# Altium PCB SB0041B.PCBDOC
Units mil, origin at the board's own origin, x right, y up, seen from the top; angles counter-clockwise.
Board outline 1825 x 1080 mil, 2 copper layers (Top Layer, Bottom Layer), stack 31.2 mil thick; 51 components, 36 nets, 174 pads, 65 vias.
Unrouted connection lines stored in the file: 1.
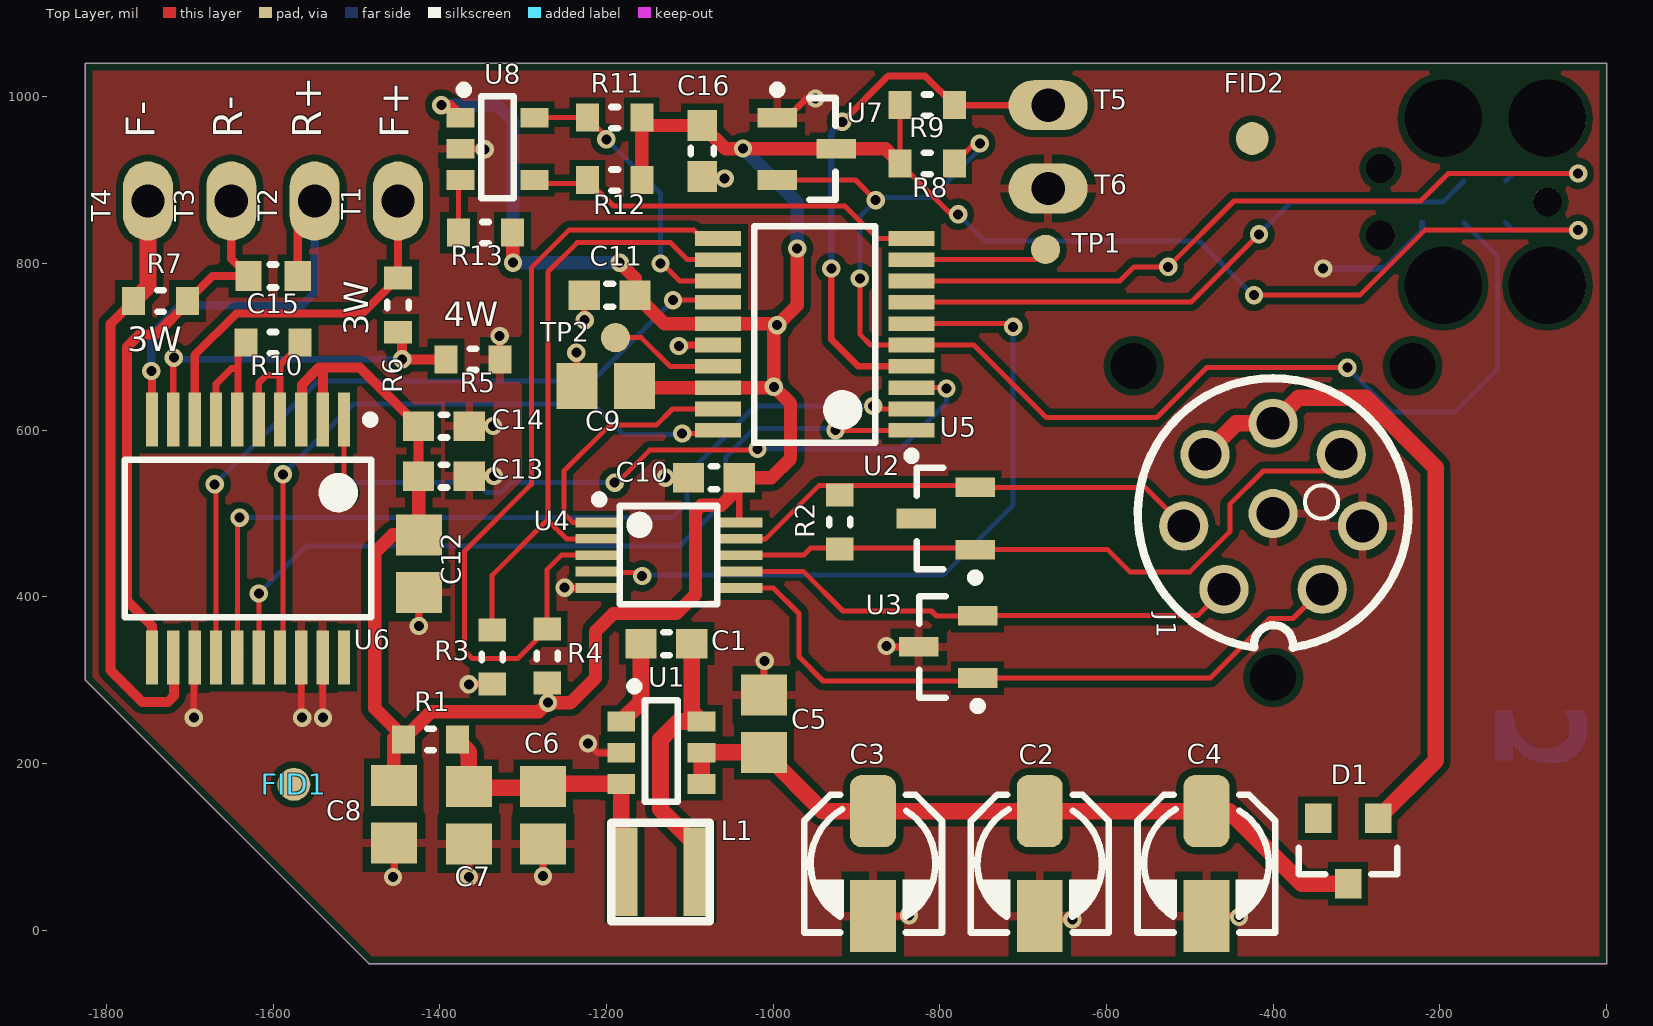
[diagram p0: Top Layer view]
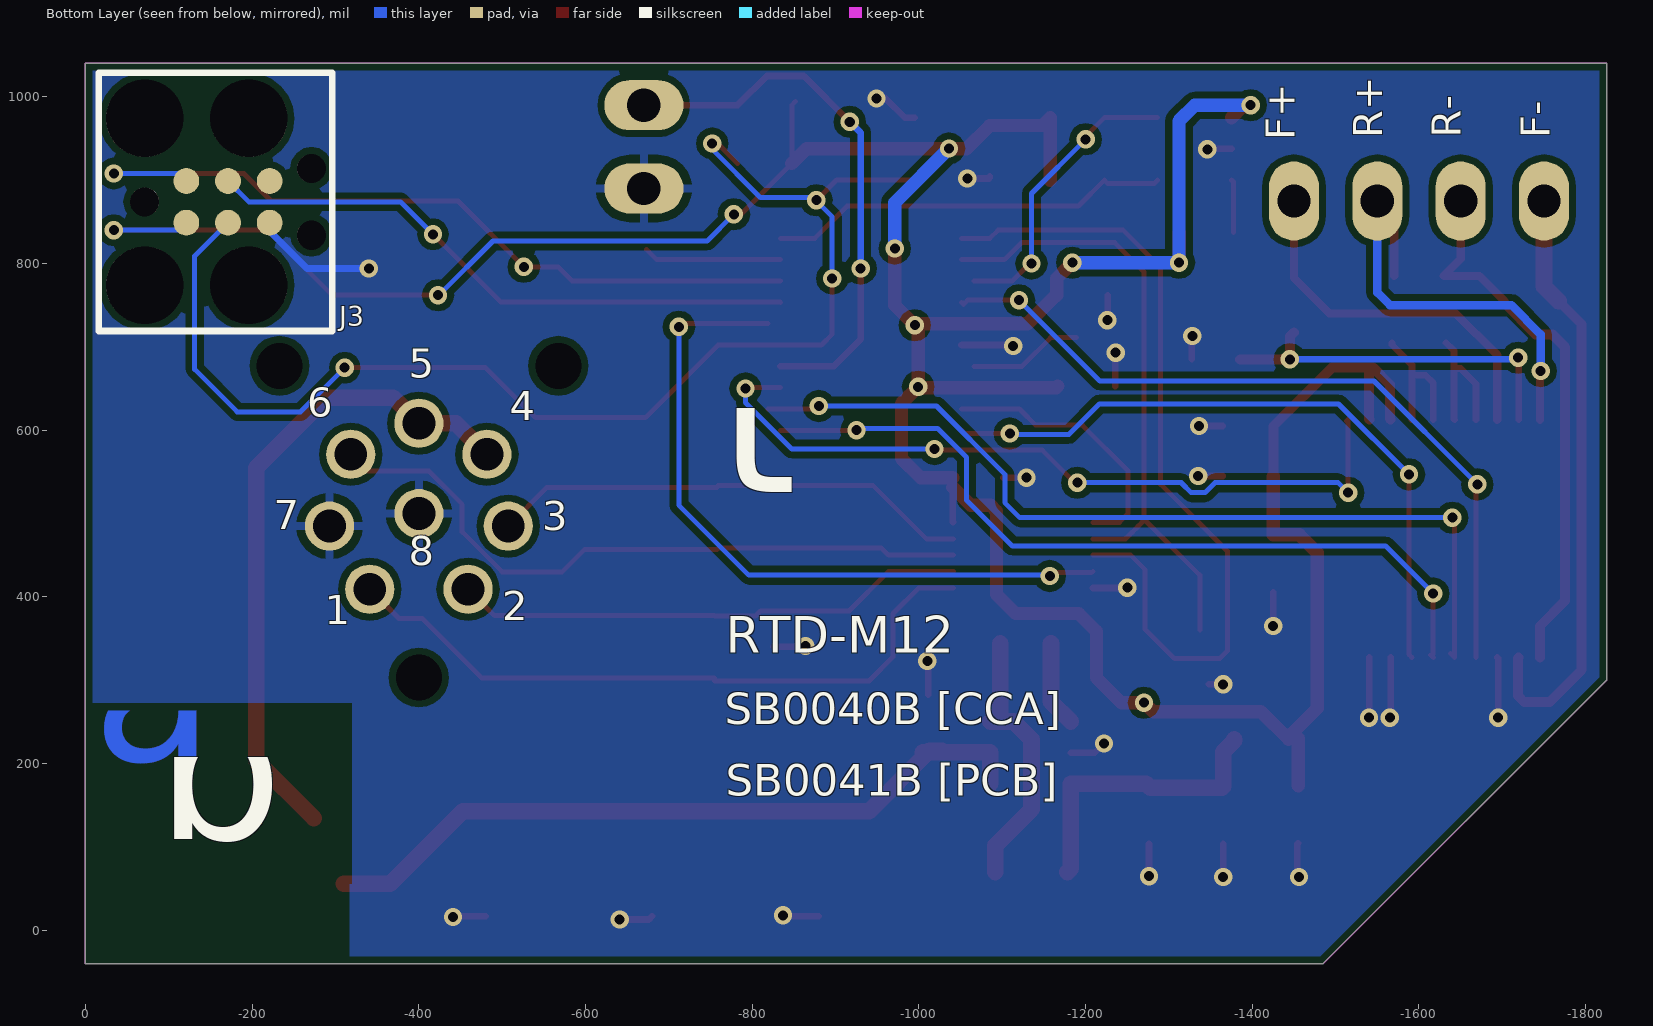
[diagram p1: Bottom Layer view, seen from below]
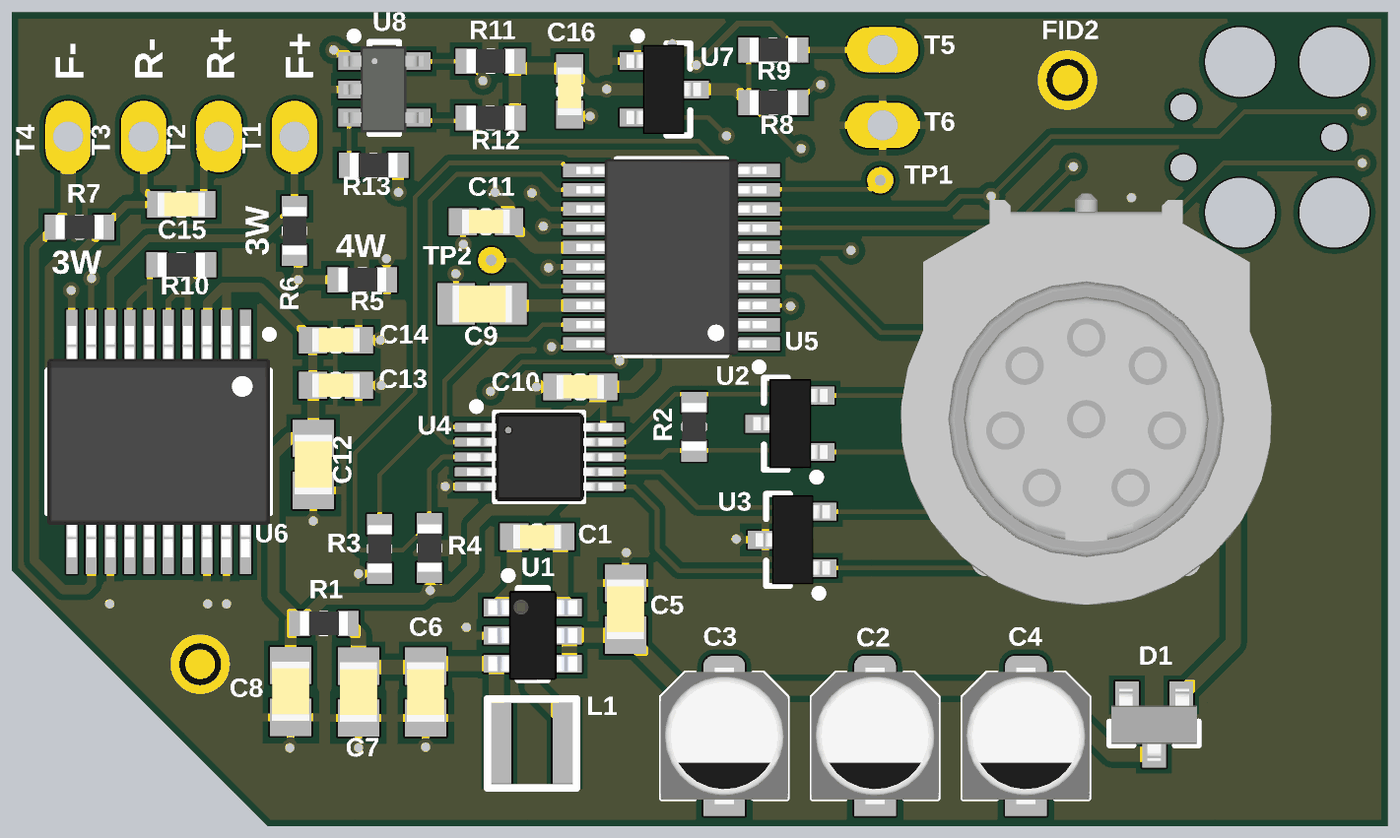
[diagram p2: 3D render of the assembled board from above, using the file's embedded part models]

## Layer stack, top to bottom
Top Solder: solder mask 0.4, Solder Resist, Dk 3.5
Top Layer: signal copper 1.4
Dielectric 3: core 28.4, Core-042, Dk 4.6
Bottom Layer: signal copper 1.4
Bottom Solder: solder mask 0.4, Solder Resist, Dk 3.5

## Board outline
-1825,300 -1485,-40 0,-40 0,1040 -1825,1040

## Design rules (kind name [scope] priority, off if disabled: settings)
Clearance [All] p1: gap=6 ignorepadtopadclearanceinfootprint=TRUE except(8: Arc-Poly Arc-Hole Track-Poly Track-Hole SMDPad-Poly SMDPad-Hole THPad-Poly THPad-Hole Via-Poly Via-Hole Fill-Poly Fill-Hole Poly-Poly Poly-Hole Region-Hole Text-Hole)
ComponentClearance [All] p1: gap=0 collisioncheckmode=3 verticalgap=0 showdistances=FALSE
DiffPairsRouting [All] p1: maxlimit=6 minlimit=6 mostfreqgap=6 toplayer_minwidth=6 toplayer_maxwidth=8 toplayer_prefwidth=8 bottomlayer_minwidth=6 bottomlayer_maxwidth=8 bottomlayer_prefwidth=8 maxuncoupledlength=500
FabricationTestPointUsage TestPointUsage [All] p1: valid=0 allowmultiple=FALSE
FabricationTestpoint Testpoint [All] p1: side=3 testpointundercomponent=TRUE minsize=40 maxsize=100 preferedsize=60 minholesize=0 maxholesize=40 preferedholesize=32 testpointgrid=1 allowsidetop=TRUE allowsidebottom=TRUE usegrid=TRUE gridtolerance=0.01
HoleSize [All] p1: absolutevalues=TRUE maxlimit=500 minlimit=8 maxpercent=80.000 minpercent=20.000
HoleToHoleClearance [All] p1: gap=0 allowstackedmicrovias=TRUE
MinimumSolderMaskSliver [All] p1: minsoldermaskwidth=0
PlaneClearance [All] p1: clearance=12
PlaneConnect [All] p1: planeconnectstyle=Relief reliefexpansion=12 reliefentries=4 reliefconductorwidth=6 reliefairgap=6
PolygonConnect PolygonConnect_vis [IsVia] p1: connectstyle=Direct reliefconductorwidth=10 reliefentries=4 polygonreliefangle="90 Angle" airgapwidth=10
PolygonConnect [All] p2: connectstyle=Relief reliefconductorwidth=10 reliefentries=4 polygonreliefangle="90 Angle" airgapwidth=10
RoutingVias [All] p1: holewidth=8 width=18 viastyle="Through Hole" minholewidth=12 minwidth=22 maxholewidth=20 maxwidth=50
ShortCircuit ShortCircuit_1 [HasFootprint('4-40 X 250') vs HasFootprint('4-40 X 250')] p1: allowed=TRUE
ShortCircuit [All] p2: allowed=FALSE
SilkToSilkClearance [All] p1: silktosilkclearance=0
SilkToSolderMaskClearance SilkscreenOverComponentPads [IsPad] p1: minsilkscreentomaskgap=1 clearancetoexposedcopper=TRUE
SolderMaskExpansion [All] p1: expansion=2.5 istentingtop=FALSE
Width 50z [InNetClass('50OHM')] p1: maxlimit=12 minlimit=10 preferedwidth=12
Width [All] p2: maxlimit=200 minlimit=6 preferedwidth=6
18 further rules are at their usual default settings.

## Components (designator, comment, footprint, x,y, rotation, side; value= is the part's Value field where it differs from the comment)
C1 "0.1µF" C0603_0.90MM_MD -1128,344 r180 top
C2 "10µF" C_ALU_B -680,80 r270 top
C3 "10µF" C_ALU_B -880,80 r270 top
C4 "10µF" C_ALU_B -480,80 r270 top
C5 "4.7µF" C0805_1.50MM_MD -1011,248 r270 top
C6 "10µF" C0805_1.25MM_MD -1276,138 r90 top
C7 "10µF" C0805_1.25MM_MD -1365,138 r90 top
C8 "10µF" C0805_1.25MM_MD -1455,139 r90 top
C9 "10µF" C0805_1.25MM_MD -1201,653 r0 top
C10 "0.1µF" C0603_0.90MM_MD -1071,543 r0 top
C11 "0.1µF" C0603_0.90MM_MD -1196,762 r0 top
C12 "10µF" C0805_1.25MM_MD -1425,440 r90 top
C13 "0.1µF" C0603_0.90MM_MD -1395,545 r180 top
C14 "0.1µF" C0603_0.90MM_MD -1395,605 r180 top
C15 "10000pF" C0603_0.90MM_HD -1600,785 r0 top
C16 "0.1µF" C0603_0.90MM_MD -1085,935 r90 top
D1 "BAT1000-7-F" D_SOT-23-3_P -310,95 r270 top
FID1 "PCB Fiducial" "Fiducial 1mm - 2mm" -1575,175 r0 top
FID2 "PCB Fiducial" "Fiducial 1mm - 2mm" -425,950 r0 top
J1 "1557808" 1557808 -400,500 r180 top locked
J3 "TC2030‐CTL‐NL" TC2030 -11,714 r180 bottom
L1 "15µH 0.53A" L_NRH3012 -1135,70 r180 top
R1 "0" R0603_0.55MM_MD -1411,229 r180 top
R2 "100" R0603_0.55MM_MD -920,490 r270 top
R3 "1k" R0603_0.55MM_MD -1337,328 r90 top
R4 "1k" R0603_0.55MM_MD -1271,329 r270 top
R5 "0" R0603_0.55MM_MD -1360,685 r0 top
R6 "0" R0603_0.55MM_MD -1450,750 r90 top
R7 "0" R0603_0.55MM_MD -1735,755 r180 top
R8 "100k" R0603_0.55MM_MD -815,920 r0 top
R9 "1k" R0603_0.55MM_MD -815,990 r0 top
R10 "401 .01% +/0 10ppm/C" R0603_0.55MM_MD -1600,705 r0 top
R11 "1k" R0603_0.55MM_MD -1190,975 r180 top
R12 "1k" R0603_0.55MM_MD -1190,900 r180 top
R13 "1k" R0603_0.55MM_MD -1345,837 r180 top
T1 "Wire Hole" SOLDER_HOLE -1450,875 r180 top
T2 "Wire Hole" SOLDER_HOLE -1550,875 r180 top
T3 "Wire Hole" SOLDER_HOLE -1650,875 r180 top
T4 "Wire Hole" SOLDER_HOLE -1750,875 r180 top
T5 "Wire Hole" SOLDER_HOLE -670,990 r90 top
T6 "Wire Hole" SOLDER_HOLE -670,890 r90 top
TP1 "SMT_TEST" "SMT_TP - 35" -673,817 r0 top
TP2 "SMT_TEST" "SMT_TP - 35" -1189,711 r0 top
U1 "TPS560430X3FDBVR" SOT95P245X145-6L -1134,213 r0 top
U2 "SM712-02HTG" SOT-23 -793,494 r180 top
U3 "SM712-02HTG" SOT-23 -790,340 r180 top
U4 "ISL3176EIUZ-T" "10 MSOP" -1125,450 r0 top
U5 "LPC804M101JDH20FP" TSOP65P640X105-20N -950,715 r180 top
U6 "MAX31865AAP+" SOP65P780X200-20N -1630,470 r270 top
U7 "MIC803-30D2VM3-TR" SOT-23 -959.57,937.6 r0 top
U8 "MCP9800A0T-M/OT" SOT23-5 -1330.71,937.6 r0 top

## Footprints (in the part's own frame and the unit in brackets; to place one, negate y for a bottom-side part, rotate by r counter-clockwise, add the part's x,y. Pads: shape width x height; smd on the part's side, far side on the other; paste and mask are expansions set on the pad)
"10 MSOP" [mm] "(Reference LTC DWG # 05-08-1661 Rev E)"
  rect 1.45x0.3 smd: 1(-2.125,1) 2(-2.125,0.5) 3(-2.125,0) 4(-2.125,-0.5) 5(-2.125,-1) 6(2.125,-1) 7(2.125,-0.5) 8(2.125,0) 9(2.125,0.5) 10(2.125,1)
  silkscreen extent -2.25,-1.5 1.48,1.82, body extent -2.45,-1.5 2.45,1.5, height 1.15
1557808 [mm]
  round 1.5 hole 1: 1(-1.498,2.306) 2(1.498,2.306) 3(2.723,0.383) 4(2.075,-1.804) 5(0,-2.75) 6(-2.075,-1.804) 7(-2.723,0.383) 8(0,0)
  round 0 hole 1.4: M(-4.25,-4.5) M(0,5) M(4.25,-4.5)
  silkscreen extent -4.12,-4.12 4.12,4.1, body extent -6.25,-7.6 6.25,6.25, height 19.51
C0603_0.90MM_HD [mm] "Capacitor 0603 - High Density"
  rect 0.8x0.9 smd: 1(-0.75,0) 2(0.75,0)
  silkscreen extent -0.1,-0.35 0.1,0.35, body extent -0.8,-0.4 0.8,0.4, height 0.9
C0603_0.90MM_MD [mm] "Capacitor 0603 - Medium Density"
  rect 0.95x0.9 smd: 1(-0.775,0) 2(0.775,0)
  silkscreen extent -0.1,-0.35 0.1,0.35, body extent -0.8,-0.4 0.8,0.4, height 0.9
C0805_1.25MM_MD [mm] "Capacitor - 0805 - Medium Density"
  rect 1.25x1.4 smd: 1(-0.875,0) 2(0.875,0)
  body extent -1,-0.62 1,0.63, height 1.25
C0805_1.50MM_MD [mm] "Capacitor - 0805 - Medium Density"
  rect 1.25x1.4 smd: 1(-0.875,0) 2(0.875,0)
  body extent -1,-0.62 1,0.63, height 1.5
C_ALU_B [mm] "4.0mm x 5.8mm"
  rrect50% 2.2x1.4 smd: 1(-1.6,0)
  rect 2.2x1.4 smd: 2(1.6,0)
  silkscreen extent -2.1,-2.1 2.1,2.1, body extent -2.3,-2.15 2.3,2.15, height 5.42
D_SOT-23-3_P [mm] "Diode - SOT-23-3 - Polarized"
  rect 0.9x0.8 smd: 1(-1,0.915) 2(-1,-0.915) 3(1,0)
  silkscreen extent -0.1,-1.5 0.7,1.5, body extent -1.2,-1.45 1.22,1.45, height 0.98
"Fiducial 1mm - 2mm" [mm] "1mm Pad 2mm Opening"
  round 1 smd paste-10 mask+0.5: 1(0,0)
L_NRH3012 [mm] "Inductor"
  rect 0.8x2.7 smd: 1(-1.1,0) 2(1.1,0)
  silkscreen extent -1.5,-1.5 1.5,1.5, body extent -1.5,-1.5 1.5,1.5, height 1.2
R0603_0.55MM_MD [mm] "Resistor 0603 Medium Density"
  rect 0.7x0.85 smd: 1(-0.825,0) 2(0.825,0)
  silkscreen extent -0.1,-0.33 0.1,0.33, body extent -0.8,-0.4 0.8,0.4, height 0.55
"SMT_TP - 35" [mil] ".035\" SMT Test pad"
  round 35 smd paste-10: 1(0,0)
SOLDER_HOLE [mil]
  oval 60x95 hole 40: 1(0,0)
SOP65P780X200-20N [mm] "SOP, 20-Leads, Body 7.20x5.30mm, Pitch 0.65mm, IPC Medium Density"
  rect 1.65x0.375 smd: 1(-3.625,2.925) 2(-3.625,2.275) 3(-3.625,1.625) 4(-3.625,0.975) 5(-3.625,0.325) 6(-3.625,-0.325) 7(-3.625,-0.975) 8(-3.625,-1.625) 9(-3.625,-2.275) 10(-3.625,-2.925) 11(3.625,-2.925) 12(3.625,-2.275) 13(3.625,-1.625) 14(3.625,-0.975) 15(3.625,-0.325) 16(3.625,0.325) 17(3.625,0.975) 18(3.625,1.625) 19(3.625,2.275) 20(3.625,2.925)
  silkscreen extent -3.75,-3.75 2.4,3.85, body extent -3.9,-3.75 3.9,3.75, height 2
SOT23-5 [mm] "SOT23, 5-Leads, Body 3.1x2.6mm (max), Pitch 0.95mm, IPC High Density"
  rect 0.85x0.6 smd: 1(-1.125,0.95) 2(-1.125,0) 3(-1.125,-0.95) 4(1.125,-0.95) 5(1.125,0.95)
  silkscreen extent -1.15,-1.5 0.5,1.92, body extent -1.38,-1.45 1.32,1.45, height 1.15
SOT95P245X145-6L [mm] "SOT23, 6-Leads, Body 3.1x2.6mm (max), Pitch 0.95mm, IPC High Density"
  rect 0.85x0.6 smd: 1(-1.225,0.95) 2(-1.225,0) 3(-1.225,-0.95) 4(1.225,-0.95) 5(1.225,0) 6(1.225,0.95)
  silkscreen extent -0.95,-1.5 0.5,2.15, body extent -1.5,-1.5 1.5,1.5, height 1.3
SOT-23 [mm] "SOT-23"
  rect 1.2x0.6 smd: 1(-0.9,0.95) 2(-0.9,-0.95) 3(0.9,0)
  silkscreen extent -1.03,-1.55 0.87,1.92, body extent -1.27,-1.5 1.23,1.5, height 1.07
TC2030 [mil] "TC2030-MCP"
  round 31 smd paste-40: 1(110,135) 2(110,185) 3(160,135) 4(160,185) 5(210,135) 6(210,185)
  round 34 hole 35 unplated: A(60,160) B(260,200) C(260,120)
  round 92 hole 93 unplated: D(60,60) E(185,60) F(60,260) G(185,260)
  silkscreen extent 5,5 285,315
TSOP65P640X105-20N [mm] "TSOP, 20-Leads, Body 6.50x4.40mm, Pitch 0.65mm, IPC Medium Density"
  rect 1.4x0.45 smd: 1(-2.95,2.925) 2(-2.95,2.275) 3(-2.95,1.625) 4(-2.95,0.975) 5(-2.95,0.325) 6(-2.95,-0.325) 7(-2.95,-0.975) 8(-2.95,-1.625) 9(-2.95,-2.275) 10(-2.95,-2.925) 11(2.95,-2.925) 12(2.95,-2.275) 13(2.95,-1.625) 14(2.95,-0.975) 15(2.95,-0.325) 16(2.95,0.325) 17(2.95,0.975) 18(2.95,1.625) 19(2.95,2.275) 20(2.95,2.925)
  silkscreen extent -3.08,-3.3 1.85,3.82, body extent -3.2,-3.3 3.2,3.3, height 1.05

## Part data
C1 C10 C11 C13 C14 C16: library part CGA3E2X7R1H104K080AE, "CAP CER 0.1UF 50V X7R 0603", Manufacturer="TDK Corporation", Operating Temperature="-55°C ~ 125°C", Package=0603, Ratings=AEC-Q200, Supplier Part Number 1=445-15957-1-ND, Temperature Coefficient=X7R, Tolerance=±10%, Voltage - Rated=50V, Category=Capacitors, ComponentLink1Description="Datasheet (Internal)", ComponentLink1URL=datasheets\TDK\mlcc_automotive_general_en.pdf, ComponentLink2Description="Datasheet (External)", ComponentLink2URL=https://product.tdk.com/info/en/catalog/datasheets/mlcc_automotive_general_en.pdf, Features="Soft Termination", Manufacturer Part Number=CGA3E2X7R1H104K080AE, Substitution Notes="0.1µF , 50V , ±10% , X7R , -55°C ~ 125°C , AEC-Q200 , 0603", Supplier 1=Digikey, Thickness (Max)=0.90MM
C2 C3 C4: library part EEE-FK1V100UR, "CAP ALUM 10UF 35V 20% SMD", ESR (Equivalent Series Resistance)=-, Lifetime @ Temp#="2000 Hrs @ 105°C", Manufacturer="Panasonic Electronic Components", Operating Temperature="-55°C ~ 105°C", Package=B, Package / Case="Radial- Can - SMD", Ratings=AEC-Q200, Ripple Current=90mA, Sort Value=10000000, Sort Value Package=B_10000000, Supplier Part Number 1=PCE3834CT-ND, Temperature Coefficient="Temperature Coefficient", Tolerance=±20%, Value_Voltage="10µF  35V", Voltage Rating=35V, Capacitance=10µF, Category=Capacitors, ComponentLink1Description="Internal Datasheet", ComponentLink1URL=http://industrial.panasonic.com/www-cgi/jvcr13pz.cgi?E+PZ+3+ABA0120+EEEFK1V100UR+7+WW, ComponentLink2Description="External Datasheet", ComponentLink2URL=http://industrial.panasonic.com/www-cgi/jvcr13pz.cgi?E+PZ+3+ABA0120+EEEFK1V100UR+7+WW, Diameter=4.00, Features="General Purpose", Height=5.80, Height - Seated (Max)="0.228\" (5.80mm)", Impedance="1.35 Ohm", Lead Spacing=-, Manufacturer Part Number=EEE-FK1V100UR, Mounting Type="Surface Mount", Packaging="Cut Tape (CT)", Size / Dimension="0.157\" Dia (4.00mm)", Supplier 1=Digi-Key, Surface Mount Land Size="0.169\" L x 0.169\" W (4.30mm x 4.30mm)"
C5: library part CGA4J1X7R1V475K125AE, "CAP CER 4.7UF 35V X7R 0805", Manufacturer="TDK Corporation", Operating Temperature="-55°C ~ 125°C", Package=0805, Ratings=AEC-Q200, Supplier Part Number 1=445-172479-1-ND, Temperature Coefficient=X7R, Tolerance=±10%, Voltage - Rated=35V, Category=Capacitors, ComponentLink1Description="Datasheet (Internal)", ComponentLink1URL=datasheets\TDK\mlcc_automotive_general_en.pdf, ComponentLink2Description="Datasheet (External)", ComponentLink2URL=https://product.tdk.com/info/en/catalog/datasheets/mlcc_automotive_general_en.pdf, Features="Soft Termination", Manufacturer Part Number=CGA4J1X7R1V475K125AE, Substitution Notes="4.7µF , 35V , ±10% , X7R , -55°C ~ 125°C , AEC-Q200 , 0805", Supplier 1=Digikey, Thickness (Max)=1.50MM
C6 C7 C8 C9 C12: library part CGA4J1X7R0J106K125AD, "CAP CER 10UF 6.3V X7R 0805", Manufacturer="TDK Corporation", Operating Temperature="-55°C ~ 125°C", Package=0805, Ratings=AEC-Q200, Supplier Part Number 1=445-9935-1-ND, Temperature Coefficient=X7R, Tolerance=±10%, Voltage - Rated=6.3V, Category=Capacitors, ComponentLink1Description="Datasheet (Internal)", ComponentLink1URL=datasheets\TDK\mlcc_automotive_general_en.pdf, ComponentLink2Description="Datasheet (External)", ComponentLink2URL=https://product.tdk.com/info/en/catalog/datasheets/mlcc_automotive_general_en.pdf, Features="Epoxy Mountable", Manufacturer Part Number=CGA4J1X7R0J106K125AD, Substitution Notes="10µF , 6.3V , ±10% , X7R , -55°C ~ 125°C , AEC-Q200 , 0805", Supplier 1=Digikey, Thickness (Max)=1.25MM
C15: library part AC0603KPX7R9BB103, "CAP CER 10000PF 50V X7R 0603", Manufacturer=Yageo, Operating Temperature="-55°C ~ 125°C", Package=0603, Ratings=AEC-Q200, Supplier Part Number 1=311-3284-1-ND, Temperature Coefficient=X7R, Tolerance=±10%, Voltage - Rated=50V, Category=Capacitors, ComponentLink1Description="Datasheet (Internal)", ComponentLink1URL=datasheets\Yageo\yageo_ac.pdf, ComponentLink2Description="Datasheet (External)", ComponentLink2URL=http://www.yageo.com/NewPortal/yageodocoutput?fileName=/pdf/MLCC/UPY-AC_NP0X7R_16V-to-630V_9.pdf, Manufacturer Part Number=AC0603KPX7R9BB103, Substitution Notes="10000pF , 50V , ±10% , X7R , -55°C ~ 125°C , AEC-Q200 , 0603", Supplier 1=Digikey, Thickness (Max)=0.90MM
D1: "DIODE SCHOTTKY 40V 1A SOT23", Capacitance @ Vr- F="175pF @ 0V- 1MHz", Current - Average Rectified (Io)=1A, Current - Reverse Leakage @ Vr="100µA @ 30V", Manufacturer="Diodes Inc", Package="TO-236-3- SC-59- SOT-23-3", Supplier Device Package=SOT-23-3, Supplier Part Number 1=BAT1000-7FDICT-ND, Voltage - DC Reverse (Vr) (Max)=40V, Voltage - Forward (Vf) (Max) @ If="500mV @ 1A", Category=Diodes, CategorySort=400, ComponentLink1Description="Internal Datasheet", ComponentLink1URL=http://www.diodes.com/datasheets/ds30245.pdf, ComponentLink2Description="External Datasheet", ComponentLink2URL=http://www.diodes.com/datasheets/ds30245.pdf, Diode Suffix=1A_3C, Diode Type=Schottky, Manufacturer Part Number=BAT1000-7-F, Mounting Type="Surface Mount", Num Pins=3, Packaging="Cut Tape (CT)", Reverse Recovery Time (trr)=-, SortValue=BAT1000-7-F, Speed="Fast Recovery =< 500ns- > 200mA (Io)", Supplier 1=Digi-Key
J1: "Circular Metric Connectors SACC-CI-M12FS -8CON-L180-THR", Current Rating=2A, Manufacturer="Phoenix Contact", Max Operating Temperature=85°C, Min Operating Temperature=-25°C, Package Quantity=60, Ratings="IP67,Waterproof,Dust Tight", Supplier Part Number 1=1557808-ND, Voltage Rating=30V, Category="Circular Connectors", ComponentLink1Description=https://datasheet.ciiva.com/618/1557808-618998.pdf?src-supplier=Digi-Key, ComponentLink1URL=https://datasheet.ciiva.com/618/1557808-618998.pdf?src-supplier=Digi-Key, ComponentLink2Description=https://datasheet.ciiva.com/3962/1557808-3962478.pdf?src-supplier=Arrow, ComponentLink2URL=https://datasheet.ciiva.com/3962/1557808-3962478.pdf?src-supplier=Arrow, ComponentLink3Description=https://datasheet.ciiva.com/29259/719945-da-01-en-sens-akt-einbaubuch-8pol-1557808-60-st-29259366.pdf?src-supplier=Conrad, ComponentLink3URL=https://datasheet.ciiva.com/29259/719945-da-01-en-sens-akt-einbaubuch-8pol-1557808-60-st-29259366.pdf?src-supplier=Conrad, Connector Type=Receptacle, Contact Gender=Female, Contact Material=Brass, Contact Plating=Gold, Fastening Type=Threaded, Gender=Female, Manufacturer Part Number=1557808, Max Current Rating=2A, Mount="Through Hole", Number of Contacts=8, Number of Ports=1, Number of Positions=8, Number of Terminals=8, Orientation=Straight, Packaging=Tray, RoHS=Yes, Strain Relief="No (Without)", Supplier 1=Digi-Key, Termination=Solder, Thread Size=M12, Weight=0.134041oz
J3: "Tag Connect Pads - No latching Clips - ARM"
L1: library part NRH3012T150MN, "Inductor 15µH 0.53A", Inductance (uH)=15, Manufacturer="Taiyo Yuden", Package=NRH3012, Rating=-, Sort Value=15_0.53, Sort Value Package=15_0.53_NRH3012, Supplier Part Number 1=587-2585-1-ND, Tolerance=±20%, Category=Inductors, CategorySort=300, ComponentLink1Description="External Datasheet", ComponentLink1URL=https://www.yuden.co.jp/productdata/catalog/en/wound04_e.pdf, DCR Max (Ohms)="540 mOhm Max", Height (mm)=1.2MM, IRMS=0.57, Isat (A)=0.53, Manufacturer Part Number=NRH3012T150MN, Part Number=NRH3012T150MN, Shielding=Sheilded, SRF typ (MHz)=26MHz, Supplier 1=Digikey, Supplier Unit Price 1=0.28
R1 R5 R6 R7: library part ERJ-3GEY0R00V, "RES 0.0 OHM 1/10W JUMP 0603 SMD", Limiting Element Voltage=75, Manufacturer="Panasonic Electronic Components", Maximum Overload Voltage=150, Maximum Working Voltage=0.0V, Package="0603 (1608 Metric)", Package Power="0603  (0.1W)", Power (Watts)="0.1W- 1/10W", Ratings=AEC-Q200, Sort Value Package=603_0, Supplier Package=0603, Supplier Part Number 1=P0.0GCT-ND, Temperature Coefficient=-, Tolerance=Jumper, Category=Resistors, ComponentLink1Description="Internal Datasheet", ComponentLink1URL="datasheets\Panasonic Electronic Components\AOA0000CE1.pdf", ComponentLink2Description="External Datasheet", ComponentLink2URL=http://industrial.panasonic.com/www-data/pdf/AOA0000/AOA0000CE1.pdf, Composition="Thick Film", Features=-, Height=0.55MM, Manufacturer Part Number=ERJ-3GEY0R00V, Number of Terminations=2, Resistance (Ohms)=0, Size / Dimension="0.063\" L x 0.031\" W (1.60mm x 0.80mm)", Sort Value=0, Substitution Notes="0 , Jumper , 0603 , AEC-Q200", Supplier 1=Digi-Key
R2: library part ERJ-3EKF1000V, "RES 100 OHM 1/10W 1% 0603 SMD", Limiting Element Voltage=75, Manufacturer="Panasonic Electronic Components", Maximum Overload Voltage=150, Maximum Working Voltage=3.2V, Package="0603 (1608 Metric)", Package Power="0603  (0.1W)", Power (Watts)="0.1W- 1/10W", Ratings=AEC-Q200, Sort Value Package=603_100, Supplier Package=0603, Supplier Part Number 1=P100HCT-ND, Temperature Coefficient=±100ppm/°C, Tolerance=±1%, Category=Resistors, ComponentLink1Description="Internal Datasheet", ComponentLink1URL="datasheets\Panasonic Electronic Components\AOA0000CE2.pdf", ComponentLink2Description="External Datasheet", ComponentLink2URL=http://industrial.panasonic.com/www-data/pdf/AOA0000/AOA0000CE2.pdf, Composition="Thick Film", Features=-, Height=0.55MM, Manufacturer Part Number=ERJ-3EKF1000V, Number of Terminations=2, Packaging="Cut Tape (CT)", Resistance (Ohms)=100, Size / Dimension="0.063\" L x 0.031\" W (1.60mm x 0.80mm)", Sort Value=100, Substitution Notes="100 , ±1% , 0603 , AEC-Q200", Supplier 1=Digi-Key
R3 R4 R9 R11 R12 R13: library part ERJ-3EKF1001V, "RES 1K OHM 1/10W 1% 0603 SMD", Limiting Element Voltage=75, Manufacturer="Panasonic Electronic Components", Maximum Overload Voltage=150, Maximum Working Voltage=10.0V, Package="0603 (1608 Metric)", Package Power="0603  (0.1W)", Power (Watts)="0.1W- 1/10W", Ratings=AEC-Q200, Sort Value=1000, Sort Value Package=603_1000, Supplier Package=0603, Supplier Part Number 1=P1.00KHCT-ND, Temperature Coefficient=±100ppm/°C, Tolerance=±1%, Category=Resistors, ComponentLink1Description="Internal Datasheet", ComponentLink1URL="datasheets\Panasonic Electronic Components\AOA0000CE2.pdf", ComponentLink2Description="External Datasheet", ComponentLink2URL=http://industrial.panasonic.com/www-data/pdf/AOA0000/AOA0000CE2.pdf, Composition="Thick Film", Features=-, Height=0.55MM, Manufacturer Part Number=ERJ-3EKF1001V, Number of Terminations=2, Packaging="Cut Tape (CT)", Resistance (Ohms)=1k, Size / Dimension="0.063\" L x 0.031\" W (1.60mm x 0.80mm)", Substitution Notes="1k , ±1% , 0603 , AEC-Q200", Supplier 1=Digi-Key
R8: library part ERJ-3EKF1003V, "RES 100K OHM 1/10W 1% 0603 SMD", Limiting Element Voltage=75, Manufacturer="Panasonic Electronic Components", Maximum Overload Voltage=150, Maximum Working Voltage=75.0V, Package="0603 (1608 Metric)", Package Power="0603  (0.1W)", Power (Watts)="0.1W- 1/10W", Ratings=AEC-Q200, Sort Value=100000, Sort Value Package=603_100000, Supplier Package=0603, Supplier Part Number 1=P100KHCT-ND, Temperature Coefficient=±100ppm/°C, Tolerance=±1%, Category=Resistors, ComponentLink1Description="Internal Datasheet", ComponentLink1URL="datasheets\Panasonic Electronic Components\AOA0000CE2.pdf", ComponentLink2Description="External Datasheet", ComponentLink2URL=http://industrial.panasonic.com/www-data/pdf/AOA0000/AOA0000CE2.pdf, Composition="Thick Film", Features=-, Height=0.55MM, Manufacturer Part Number=ERJ-3EKF1003V, Number of Terminations=2, Packaging="Cut Tape (CT)", Resistance (Ohms)=100k, Size / Dimension="0.063\" L x 0.031\" W (1.60mm x 0.80mm)", Substitution Notes="100k , ±1% , 0603 , AEC-Q200", Supplier 1=Digi-Key
R10: "402 ±0.1% 0.15W Chip Resistor 0603 (1608 Metric) Anti-Sulfur, Automotive AEC-Q200 Thin Film", Manufacturer="TE Connectivity", Manufacturer Part Number=RQ73C1J402RBTD, Supplier Part Number 1=A140868CT-ND, Category="Chip SMD Resistors", Pricing="1=0.73000, 10=0.60900, 100=0.40910, 1000=0.23936, 2500=0.23675 (USD)", RoHS=No, Stock=7920, Supplier 1=Digi-Key
T1 T2 T3 T4 T5 T6: library part SOLDER_HOLE
U1: "Buck Switching Regulator IC Positive PWM 3.3V 1 Output 600mA SOT-23-6", Manufacturer="Texas Instruments", Supplier Part Number 1=296-51994-1-ND, Manufacturer Part Number=TPS560430X3FDBVR, Pricing 1="1 = 2.01000, 10 = 1.80100, 100 = 1.44800, 500 = 1.18966, 1000 = 0.98571 (USD)", Stock 1=3365, Supplier 1=Digi-Key
U2 U3: "LITTELFUSE - SM712-02HTG - ESD Protection Device, 31 V, SOT-23, 3 Pins, 12 V, 600 W, SPA SM712 Series", Breakdown Voltage=13.3V, Capacitance=75pF, Case/Package=SOT-23-3, Clamping Voltage=31V, Leakage Current=20uA, Manufacturer=Littelfuse, Max Operating Temperature=125°C, Max Power Dissipation=600W, Max Surge Current=19A, Min Operating Temperature=-40°C, Package Quantity=3000, Power Line Protection=No, Reverse Standoff Voltage=12V, Supplier Part Number 1=F6450DKR-ND, Category="TVS Diodes", ComponentLink1Description=http://www.farnell.com/datasheets/2915217.pdf?src-supplier=Farnell, ComponentLink1URL=http://www.farnell.com/datasheets/2915217.pdf?src-supplier=Farnell, ComponentLink2Description=http://www.mouser.com/ds/2/240/Littelfuse_TVS_Diode_Array_SM712_Datasheet.pdf-345740.pdf?src-supplier=Mouser, ComponentLink2URL=http://www.mouser.com/ds/2/240/Littelfuse_TVS_Diode_Array_SM712_Datasheet.pdf-345740.pdf?src-supplier=Mouser, ComponentLink3Description=http://components.arrow.com/part/dataview/66888491S1073949N9157?src-supplier=Arrow+Electronics, ComponentLink3URL=http://components.arrow.com/part/dataview/66888491S1073949N9157?src-supplier=Arrow+Electronics, ComponentLink4Description=http://www.farnell.com/datasheets/1853511.pdf?src-supplier=Newark, ComponentLink4URL=http://www.farnell.com/datasheets/1853511.pdf?src-supplier=Newark, ComponentLink5Description=https://www.littelfuse.com/~/media/electronics/datasheets/tvs_diode_arrays/littelfuse_tvs_diode_array_sm712_datasheet.pdf.pdf?src-supplier=Digi-Key, ComponentLink5URL=https://www.littelfuse.com/~/media/electronics/datasheets/tvs_diode_arrays/littelfuse_tvs_diode_array_sm712_datasheet.pdf.pdf?src-supplier=Digi-Key, ComponentLink6Description=http://www.farnell.com/datasheets/2277128.pdf?src-supplier=Newark, ComponentLink6URL=http://www.farnell.com/datasheets/2277128.pdf?src-supplier=Newark, ComponentLink7Description=http://www.farnell.com/datasheets/2915217.pdf?src-supplier=Element14, ComponentLink7URL=http://www.farnell.com/datasheets/2915217.pdf?src-supplier=Element14, Composition=Zener, Depth=1.4mm, Direction=Bidirectional, Element Configuration=Dual, Lead Free="Lead Free", Length=3.04mm, Manufacturer Part Number=SM712-02HTG, Min Breakdown Voltage=13.3V, Mount="Surface Mount", Number of Bidirectional Channels=2, Number of Channels=2, Number of Pins=3, Packaging="Tape and Reel", Peak Pulse Current=19A, Peak Pulse Power=600W, Polarity=Bidirectional, Pricing="1=0.75000, 10=0.62000, 100=0.48000, 500=0.36000, 1000=0.27600 (USD)", Radiation Hardening=No, RoHS=Yes, Stock=93132, Supplier 1=Digi-Key, Termination=SMD/SMT, Working Voltage=12V
U4: "IC TXRX RS422/485 20MBPS 10MSOP", Manufacturer=Intersil, Operating Temperature="-40°C ~ 85°C", Package / Case="10-TFSOP, 10-MSOP (0.118\", 3.00mm Width)", Supplier Device Package=10-MSOP, Supplier Part Number 1=ISL3176EIUZ-TCT-ND, Voltage - Supply="3 V ~ 3.6 V", Category="Integrated Circuits (ICs)", ComponentLink1Description=http://www.intersil.com/content/dam/intersil/documents/isl3/isl3170e-71e-72e-73e-74e-75e-76e-77e-78e.pdf, ComponentLink1URL=http://www.intersil.com/content/dam/intersil/documents/isl3/isl3170e-71e-72e-73e-74e-75e-76e-77e-78e.pdf, Data Rate=20Mbps, Duplex=Full, Manufacturer Part Number=ISL3176EIUZ-T, Mounting Type="Surface Mount", Number of Drivers/Receivers=1/1, Packaging="Cut Tape (CT)", Part Status=Active, Pricing 1="1=1.79, 10=1.61, 100=1.2944, 500=1.06348, 1000=0.88117 (USD)", Protocol="RS422, RS485", RoHS="RoHS Compliant", Stock 1=9164, Supplier 1=Digi-Key, Type=Transceiver
U5: "MCU 32-bit ARM Cortex M0+ RISC 32KB Flash 3.3V 20-Pin TSSOP Tube", Manufacturer="NXP Semiconductors", Supplier Part Number 1=568-13824-ND, Category=Microcontrollers, Manufacturer Part Number=LPC804M101JDH20FP, Pricing="1=1.56000, 10=1.39500, 25=1.32440, 100=1.08790, 250=1.01696, 500=0.89870, 1000=0.70950, 2500=0.66220, 5000=0.62909 (USD)", RoHS=No, Stock=1734, Supplier 1=Digi-Key
U6: "Temp Monitoring System (Sensor)  External Sensor SPI Output 20-SSOP", Case/Package=SSOP, Manufacturer=Maxim, Max Operating Temperature=125°C, Min Operating Temperature=-40°C, Supplier Part Number 1=MAX31865AAP+-ND, ComponentLink1Description=http://www.mouser.com/ds/2/256/MAX31865-775735.pdf, ComponentLink1URL=http://www.mouser.com/ds/2/256/MAX31865-775735.pdf, ComponentLink2Description=https://media.digikey.com/pdf/Data%20Sheets/Maxim%20PDFs/PartNumberBreakdown_ds.pdf, ComponentLink2URL=https://media.digikey.com/pdf/Data%20Sheets/Maxim%20PDFs/PartNumberBreakdown_ds.pdf, Manufacturer Part Number=MAX31865AAP+, Mount="Surface Mount", Output Type=SPI, Packaging=Rail/Tube, Pricing 1="1=3.47, 10=3.329 (USD)", Pricing 2="1=3.47, 10=3.33, 50=3.3, 100=3.3, 1000=3.3, 10000=3.3 (USD)", Stock 1=622, Stock 2=9867, Supplier 1=Digi-Key, Supplier 2=Mouser, Supplier Part Number 2=700-MAX31865AAP+
U7: "3-Pin Microprocessor Supervisor Circuit w/ Open-Drain Reset Output, 3 SOT-23 - T/R", Case/Package=TO-236-3, Manufacturer=Microchip, Max Operating Temperature=125°C, Min Operating Temperature=-40°C, Number of Voltages Monitored=1, Supplier Part Number 1=576-3808-1-ND, Threshold Voltage=3V, Lead Free="Lead Free", Manufacturer Part Number=MIC803-30D2VM3-TR, Mount="Surface Mount", Packaging="Cit Tape (CT)", Pricing 1="1=0.3, 25=0.252, 100=0.231 (USD)", Reset="Active Low", Reset Timeout=20ms, Stock 1=3642, Supplier 1=Digi-Key, Type="Simple Reset/Power-On Reset"
U8: "SENSOR TEMP I2C/SMBUS SOT23-5", Manufacturer="Microchip Technology", Operating Temperature="-55°C ~ 125°C", Package / Case="SC-74A, SOT-753", Sensing Temperature - Remote=-, Supplier Device Package=SOT-23-5, Supplier Part Number 1=MCP9800A0T-M/OTCT-ND, Voltage - Supply="2.7 V ~ 5.5 V", Accuracy - Highest (Lowest)="±1°C (±3°C)", Category="Sensors, Transducers", ComponentLink1Description=http://www.microchip.com/mymicrochip/filehandler.aspx?ddocname=en021183, ComponentLink1URL=http://www.microchip.com/mymicrochip/filehandler.aspx?ddocname=en021183, Features="One-Shot, Output Switch, Programmable Limit, Programmable Resolution, Shutdown Mode", Manufacturer Part Number=MCP9800A0T-M/OT, Mounting Type="Surface Mount", Output Type=I²C/SMBus, Packaging="Tape & Reel (TR)", Part Status=Active, Pricing 1="3000=0.9373 (USD)", Resolution="11 b", RoHS="RoHS Compliant", Sensing Temperature - Local="-55°C ~ 125°C", Sensor Type="Digital, Local", Stock 1=12000, Supplier 1=Digi-Key, Test Condition="-10°C ~ 85°C (-55°C ~ 125°C)"

## Free pads (board coordinates)
  round 10 on Mech16: 1(-6390,-4040.26) 1(-6390,-3040.26) 1(-4640,-2540.26) 1(-4140,-2540.26) 1(-3691.16,-5328.22) 1(-2390,-4040.26) 1(-2390,-3040.26)

## Via types
v1: diameter 22, hole 12, Top Layer to Bottom Layer, tented both sides, 65 vias

## Nets (pads, with @x,y where several pads share a name; then routed paths per layer and width w, separated by ;. In a path a pad name is that pad's centre, name@x,y a point inside that pad or via, vN(x,y) a via of type N, cw(c..) or ccw(c..) an arc to the next point about the centre after c; other vN are vias at no path point)
+3V3: C8.2 C9.2 C10.2 C11.2 C12.2 C13.2 C14.2 C16.2 J3.1 R1.2 R4.2 R8.1 R9.1 R11.1 R12.1 R13.1 U4.10 U5.15 U5.18 U6.2 U6.3 U7.3 U8.1 | length 4277
  Top Layer w6: R9.1@-852,994.52 R9.1 R8.1 -786.48,859 v1(-778,859) ; v1(-423,762) -296,762 -218,840 v1(-34,840)
  Top Layer w8: U4.10 -1040.49,490.22 -1040.49,531.51 C10.2
  Top Layer w12: U6.3 -1565,613.74 -1565,655 -1545,675 -1495.51,675 C14.2 C13.2 ; U6.2 -1540,613.15 -1540,675
  Top Layer w16: C8.2 -1455,230.48 -1448.5,236.98 -1478,266.47 -1478,453 -1456.55,474.45 C12.2 -1425,544.49 C13.2 ; R1.2 -1410.48,262 -1281,262 v1(-1270,273) -1243,273 -1213,303 -1213,359 -1192,380 -1116,380 -1093,403 -1093,503 -1086,510 -1062,510 C10.2@-1040.49,531.51 ; v1(-1398,990) -1396,988 -1388,988 U8.1 ; R13.1 -1312.52,801.52 v1(-1312,801) ; v1(-1184,801) -1165.49,782.49 C11.2 -1164.5,762 -1130.3,727.8 U5.15 -1006.2,727.8 -1006,728 -997,728 v1(-995,726) ; C9.2 -1164.57,651.02 U5.18 -999.98,651.02 v1(-999,652) ; R12.1 R11.1 -1148.03,965.51 C16.2 -1057.09,937.6 U7.3 -865.08,937.6 R8.1 ; C10.2 -1002,543 -979,566 -979,632 v1(-999,652) ; v1(-971,818) -971,750 v1(-995,726) ; v1(-999,652) -999,722 v1(-995,726)
  Bottom Layer w6: v1(-778,859) -746,827 -489,827 -424,762 v1(-423,762) ; J3.1 -112,840 v1(-34,840)
  Bottom Layer w16: v1(-1398,990) -1331,990 -1312,971 v1(-1312,801) v1(-1184,801) ; v1(-1036,938) -971,873 v1(-971,818)
+VIN: D1.1 J1.4 J1.5 | length 788.9
  Top Layer w20: J1.4 -444.47,608.27 J1.5 -369.27,639 -289,639 -205,555 -205,203.35 D1.1
BOOT_ENTRY: R9.2 T5.1 U5.4 | length 660.2
  Top Layer w8: v1(-930,794) -930,709 -897.61,676.61 U5.4 ; v1(-917,970) -862,1025 -817.52,1025 R9.2 T5.1
  Bottom Layer w8: v1(-930,794) -930,957 v1(-917,970)
F+: R6.2 T1.1 U6.8 | length 459.2
  Top Layer w10: U6.8 -1693.98,690.02 -1644,740 -1492.48,740 R6.2 T1.1
  Bottom Layer w10: T1.1@-1455,870 T1.1
F-: R7.2 T4.1 U6.12 | length 722.8
  Top Layer w12: R7.2 -1795,727.48 -1795,312 -1757,274 -1726,274 -1719,281 -1719,326.72 U6.12
  Top Layer w20: R7.2 -1750,772.48 T4.1
GND: C2.2 C3.2 C4.2 C5.1 C6.1 C7.1 C8.1 C9.1 C10.1 C11.1 C12.1 C13.1 C14.1 C16.1 J1.7 J1.8 J3.5 R3.1 R5.2 T6.1 U1.2 U3.3 U4.5 U5.16 U6.13 U6.18 U6.19 U7.1 U8.2 | length 1205
  Top Layer w8: v1(-1695,255) -1695,326.26 U6.13 ; U6.18 -1566.02,256.02 v1(-1565,255) ; U6.19 -1540.43,255.43 v1(-1540,255) ; v1(-1456,64) -1454,66 -1454,103.55 C8.1 ; v1(-1425,365) C12.1 ; U8.2 -1346.6,937.6 v1(-1346,937) ; v1(-1365,64) -1362,67 -1365,70 C7.1 ; v1(-1365,295) R3.1@-1348,295 ; C13.1 v1(-1335,545) ; C14.1 v1(-1336,605) ; v1(-1328,713) -1327.52,712.48 R5.2 ; v1(-1276,65) C6.1 ; v1(-1250,411) -1242.74,411 -1242.37,410.63 U4.5 ; v1(-1236,693) -1236,694 -1235.45,694.55 C9.1 ; C11.1 -1226.51,732.49 v1(-1226,732) ; v1(-1222,224) -1211,213 U1.2 ; v1(-1129,543) -1123.56,543 -1122.56,544 -1121.56,543 C10.1 ; v1(-1113,701) -1103,701 -1101.8,702.2 U5.16@-1051.14,702.2 ; C16.1 -1085,903 -1084,902 v1(-1058,902) ; C5.1 -1011,322 -1010,321 v1(-1010,323) ; U7.1 -983,975 -960,998 v1(-949,998) ; C3.2 -837.01,17.01 -836,16 -836,17 v1(-837,18) ; v1(-864,341) -862,339 -859,339 -858,340 U3.3 ; C2.2 -675.99,13 v1(-641,13) ; C4.2 -442.01,17.01 v1(-441,16)
  Bottom Layer w8: v1(-340,794) -266,794 -221,839 J3.5
nCS_TMP: U5.1 U6.16 | length 976.2
  Top Layer w6: U6.16 U6.16@-1615,329.49 ; v1(-1617,404) -1617,331.49 U6.16@-1615,329.49 ; U6.16@-1614,330.49 U6.16@-1615,329.49 ; v1(-925,600) -925,599.84 U5.1
  Bottom Layer w6: v1(-1617,404) -1560,461 -1112,461 -1057,516 -1057,567.46 -1022.46,602 -927,602 v1(-925,600)
nDRDY: U5.3 U6.1 | length 932.9
  Top Layer w6: v1(-1515,525) -1515,612.56 U6.1 U6.1@-1513,610.87 ; v1(-1190,537) -1187,537 -1148,576 v1@-1017.3,576 ; v1(-1018.74,577.44) v1@-1017.3,576 ; v1@-1015,576 v1@-1017.3,576 ; U5.3 -793.02,651.02 v1(-792,650)
  Bottom Layer w6: v1(-1515,525) -1503,537 -1355,537 -1355,536.72 -1343.28,525 -1326.72,525 -1315,536.72 -1315,537 v1(-1190,537) ; v1(-1018.74,577.44) -847.56,577.44 -792,633 v1(-792,650)
NetC1_1: C1.1 L1.1 U1.6 | length 334.1
  Top Layer w20: C1.1 -1097.49,262.12 U1.6 ; L1.1 -1091.69,101.69 -1135,145 -1135,229 -1113.6,250.4 U1.6 ; U1.6@-1086.17,250 U1.6
NetC1_2: C1.2 U1.1 | length 103.4
  Top Layer w20: U1.1 -1158.51,274.12 C1.2
NetC2_1: C2.1 C3.1 C4.1 C5.2 D1.3 U1.4 U1.5 | length 903
  Top Layer w20: U1.4 U1.5 -1085.22,213.55 -1028.01,213.55 C5.2 ; C5.2@-1028.01,215.01 -1012.46,215.01 C5.2 ; C5.2@-1004.45,213.55 C5.2 ; D1.3 -365.63,55.63 -452.99,142.99 C4.1 C2.1 C3.1 -940.44,142.99 C5.2
NetC6_2: C6.2 C7.2 L1.2 R1.1 U1.3 | length 354.7
  Top Layer w20: R1.1 -1378.52,227.52 -1365,214 C7.2 -1363.55,171 -1277.45,171 C6.2 -1272.85,175.6 U1.3 -1182.23,73.92 L1.2
NetR5_1: R5.1 R6.1 U6.9 | length 446.9
  Top Layer w8: U6.9 -1719.57,680.43 -1715.49,684.51 -1717.98,687 v1(-1719,687)
  Top Layer w12: R6.1 -1445,712.52 v1(-1445,685) R5.1 R5.1@-1385.52,685
  Bottom Layer w8: v1(-1719,687) -1717,687 -1715,685 v1(-1445,685)
NetR10_1: R10.1 U6.6 U6.7 | length 173.5
  Top Layer w8: U6.7 -1668.39,655.61 -1650,674 -1642,674 ; U6.6 -1642,613.51 -1642,674 ; R10.1 -1642,695.48 -1642,674
NetR10_2: R10.2 U6.4 U6.5 | length 175.7
  Top Layer w8: U6.5 -1617.2,656.8 -1608,666 -1591.61,666 ; U6.4 -1591.61,666 ; R10.2 -1567.52,702.48 -1591.61,678.39 -1591.61,666
NetR13_2: R13.2 U8.3 | length 64.2
  Top Layer w6: R13.2 -1377.48,897.72 U8.3
NetTP1_1: TP1.1 U5.9 | length 166
  Top Layer w6: U5.9 -833.43,805 -685,805 TP1.1
NetTP2_1: TP2.1 U5.17 | length 137.1
  Top Layer w6: TP2.1 -1158,711 -1123.61,676.61 U5.17
nRESET: J3.3 R8.2 U5.5 U7.2 | length 1561
  Top Layer w6: U7.2 -901.2,900.2 v1(-877,876) ; v1(-896,782) -896,715 -883.2,702.2 U5.5 -759.2,702.2 -672,615 -540,615 -480,675 v1(-311,675) ; R8.2 -758.52,944 v1(-752,944)
  Bottom Layer w6: v1(-896,782) -896,856 -873,879 -810,879 -752,937 v1(-752,944) ; v1(-311,675) -258,622 -182,622 -131,673 -131,809 J3.3
R+: C15.2 T2.1 U6.10 | length 536.1
  Top Layer w10: v1(-1746,671) -1746,674.32 -1745.16,675.16 U6.10 ; C15.2 -1570.46,854.54 T2.1
  Bottom Layer w10: v1(-1746,671) -1746,715 -1711,750 -1565,750 -1550,765 T2.1
R-: C15.1 R7.1 T3.1 U6.11 | length 665.7
  Top Layer w10: R7.1@-1702.52,752.48 R7.1 -1672.52,785 C15.1 -1650,805.48 T3.1
  Top Layer w12: U6.11 -1745.16,365.16 -1775,395 -1775,700 -1760,715 -1740,715 R7.1@-1702.52,752.48
RX: U4.1 U5.19 | length 328.4
  Top Layer w6: U4.1 -1240.37,489.37 -1251,500 -1251,551 -1196,606 -1140,606 -1120.57,625.43 U5.19@-1051.14,625.43
RXEN0: R3.2 U4.2 U5.12 | length 771
  Top Layer w6: R3.2 -1337,426 -1270,493 ; U4.2 -1247.88,469.69 -1255.57,477.37 -1255.97,477.37 -1263,484.4 -1263,484.8 -1270,491.8 -1270,790 -1235,825 -1172,825 -1123,825 -1102.57,804.57 U5.12@-1051.14,804.57
RXN_0: J1.6 R2.2 U2.1 U4.8 | length 812.9
  Top Layer w6: U4.8 -963.52,450 -954.92,458.6 -920,458.6 U2.1@-760,458.6 ; U2.1 -598.6,456.6 -572,430 -500,430 -452,478 -452,511 -412,551 -338.32,551 J1.6
RXP_0: J1.3 R2.1 U2.2 U4.9 | length 578.3
  Top Layer w6: U4.9 -1008.8,469.69 -945.08,533.4 -920,533.4 U2.2@-759,533.4 ; U2.2 -553.68,531.4 J1.3
SCL: R12.2 U5.10 U8.4 | length 484.9
  Top Layer w6: U8.4 -1282.22,896 -1226.48,896 R12.2 -1191.48,869 -914,869 -875.16,830.16 U5.10
SDA: R11.2 U5.13 U8.5 | length 352.7
  Top Layer w6: U8.5 R11.2 -1200,952.52 v1(-1200,949) ; v1(-1135,800) -1133,800 -1111.98,778.98 U5.13
  Bottom Layer w6: v1(-1200,949) -1135,884 v1(-1135,800)
SWDCLK: J3.4 U5.7 | length 723.2
  Top Layer w6: U5.7 -833.24,754 -498,754 v1(-417,835)
  Bottom Layer w6: v1(-417,835) -378,874 -196,874 J3.4
SWDIO: J3.2 U5.8 | length 945
  Top Layer w6: U5.8@-833.83,779 -710,779 ; -711,778.98 -584.02,778.98 -567,796 v1(-526,796) -447,875 -223,875 -190,908 v1(-34,908)
  Bottom Layer w6: J3.2 -112,908 v1(-34,908)
TEMP_SDI: U5.14 U6.14 | length 921.8
  Top Layer w6: v1(-1670,535) -1668.39,533.39 U6.14 ; v1(-1120,756) -1058.53,756 -1054.53,752 -1053.53,751 -1052.53,752 U5.14@-1051.14,753.39
  Bottom Layer w6: v1(-1670,535) -1546,659 -1217,659 v1(-1120,756)
TEMP_SDO: U5.20 U6.17 | length 810.2
  Top Layer w6: U6.17 -1590,328.9 -1588,330.9 v1(-1588,547) ; v1(-1109,596) -1054.98,596 U5.20@-1051.14,599.84
  Bottom Layer w6: v1(-1588,547) -1503.5,631.5 -1216.5,631.5 -1180,595 -1110,595 v1(-1109,596)
TMP_CLK: U5.2 U6.15 | length 1073.7
  Top Layer w6: v1(-1640,495) -1642.8,492.2 U6.15 U6.15@-1638,332.08 ; v1(-880,629) -876.43,625.43 U5.2@-818.86,625.43
  Bottom Layer w6: v1(-1640,495) -1121,495 -1103.02,512.98 -1103.02,546.98 -1021,629 v1(-880,629)
TX: U4.4 U5.6 | length 859.4
  Top Layer w6: U4.4 -1207.35,429 -1157,429 v1(-1157,425) ; U5.6@-818.86,727.8 -715.8,727.8 v1(-712,724)
  Bottom Layer w6: v1(-1157,425) -1157,426 -796,426 -712,510 -712,677 v1(-712,724)
TXEN0: R4.1 U4.3 U5.11 | length 1013
  Top Layer w6: U4.3 -1254,450 -1271,433 R4.1 -1306.48,326 -1361,326 -1370,335 -1370,455 -1290,535 -1290,795 -1245,840 -1095,840 -1085.16,830.16 U5.11@-1051.14,830.16
TXN_0: J1.2 U3.2 U4.7 | length 617.8
  Top Layer w6: U4.7 -963.31,430.32 -916,383 -810,383 -804,377 -754.97,377 U3.2 -490.76,377.4 J1.2
TXP_0: J1.1 U3.1 U4.6 | length 821.2
  Top Layer w6: U4.6 -999.63,410.63 -969,380 -969,328 -940,299 U3.1@-754.57,299 ; U3.1 -705.11,302.6 -475.4,302.6 -404,374 -376.23,374 J1.1
pads on no net: D1.2 FID1.1 FID2.1 J1.M J3.6 J3.A J3.B J3.C J3.D J3.E J3.F J3.G U2.3 U6.20

## Polygon pours and split planes (outlines as drawn)
GND on Bottom Layer "GND_L02_P000" (solid, remove dead copper, pour order 0): -1900,1125 -1900,-275 125,-275 125,1125
GND on Top Layer "GND_L01_P001" (solid, remove dead copper, pour order 1): -1875,1075 -1875,-100 50,-100 50,1075

## Keep-outs
Keep-Out Layer:
  the board outline again, w1

## Other copper
Bottom Layer:
  pour cut-out: -0.88,-39 -0.87,271 -317,271 -317,-39
  text "a" at -8,61 h750

## Silkscreen, mask and mechanical layers (free items; w line width, h text height)
Top Overlay:
  circle w5: c-342,514 r20
  text "F-" at -1730,950 h60 r90
  text "R-" at -1625,950 h60 r90
  text "R+" at -1530,950 h60 r90
  text "F+" at -1425,950 h60 r90
  text "3W" at -1476,714 h50 r90
  text "4W" at -1395,715 h50
  text "3W" at -1775,685 h50
Bottom Overlay:
  text "F-" at -1769,950 h60 r270
  text "R-" at -1662,951 h60 r270
  text "R+" at -1568,950 h60 r270
  text "F+" at -1463,948 h60 r270
  text "t" at -759,431 h500
  text "RTD-M12" at -768,318.64 h75
  text "SB0040B [CCA]" at -767,234.88 h65
  text "SB0041B [PCB]" at -768,148.88 h65
  text "b" at -85,-33 h750
Bottom Solder:
  text "a" at -8,61 h750
  text "e" at -65,-32 h750
[8] Board Outline:
  lines w1: -1825,300 -1485,-40 0,-40 0,1040 -235,1040 -1825,1040 -1825,300

## Text inside footprints (layer, text, board x,y; h text height)
J1: Bottom Overlay "2" at -500,360 h60; Bottom Overlay "3" at -548,468 h60; Bottom Overlay "4" at -509,600 h60; Bottom Overlay "5" at -388,651 h60; Bottom Overlay "6" at -266,604 h60; Bottom Overlay "1" at -287,355 h60; Bottom Overlay "7" at -226,469 h60; Bottom Overlay "8" at -388,426 h60